# Altium PCB PCB1.PcbDoc (part 2 of 2)
Units mil, origin at the board's own origin, x right, y up, seen from the top; angles counter-clockwise.
Board outline 5700 x 5590 mil, 2 copper layers (Top Layer, Bottom Layer); 82 components, 63 nets, 275 pads, 102 vias.
Unrouted connection lines stored in the file: 1.
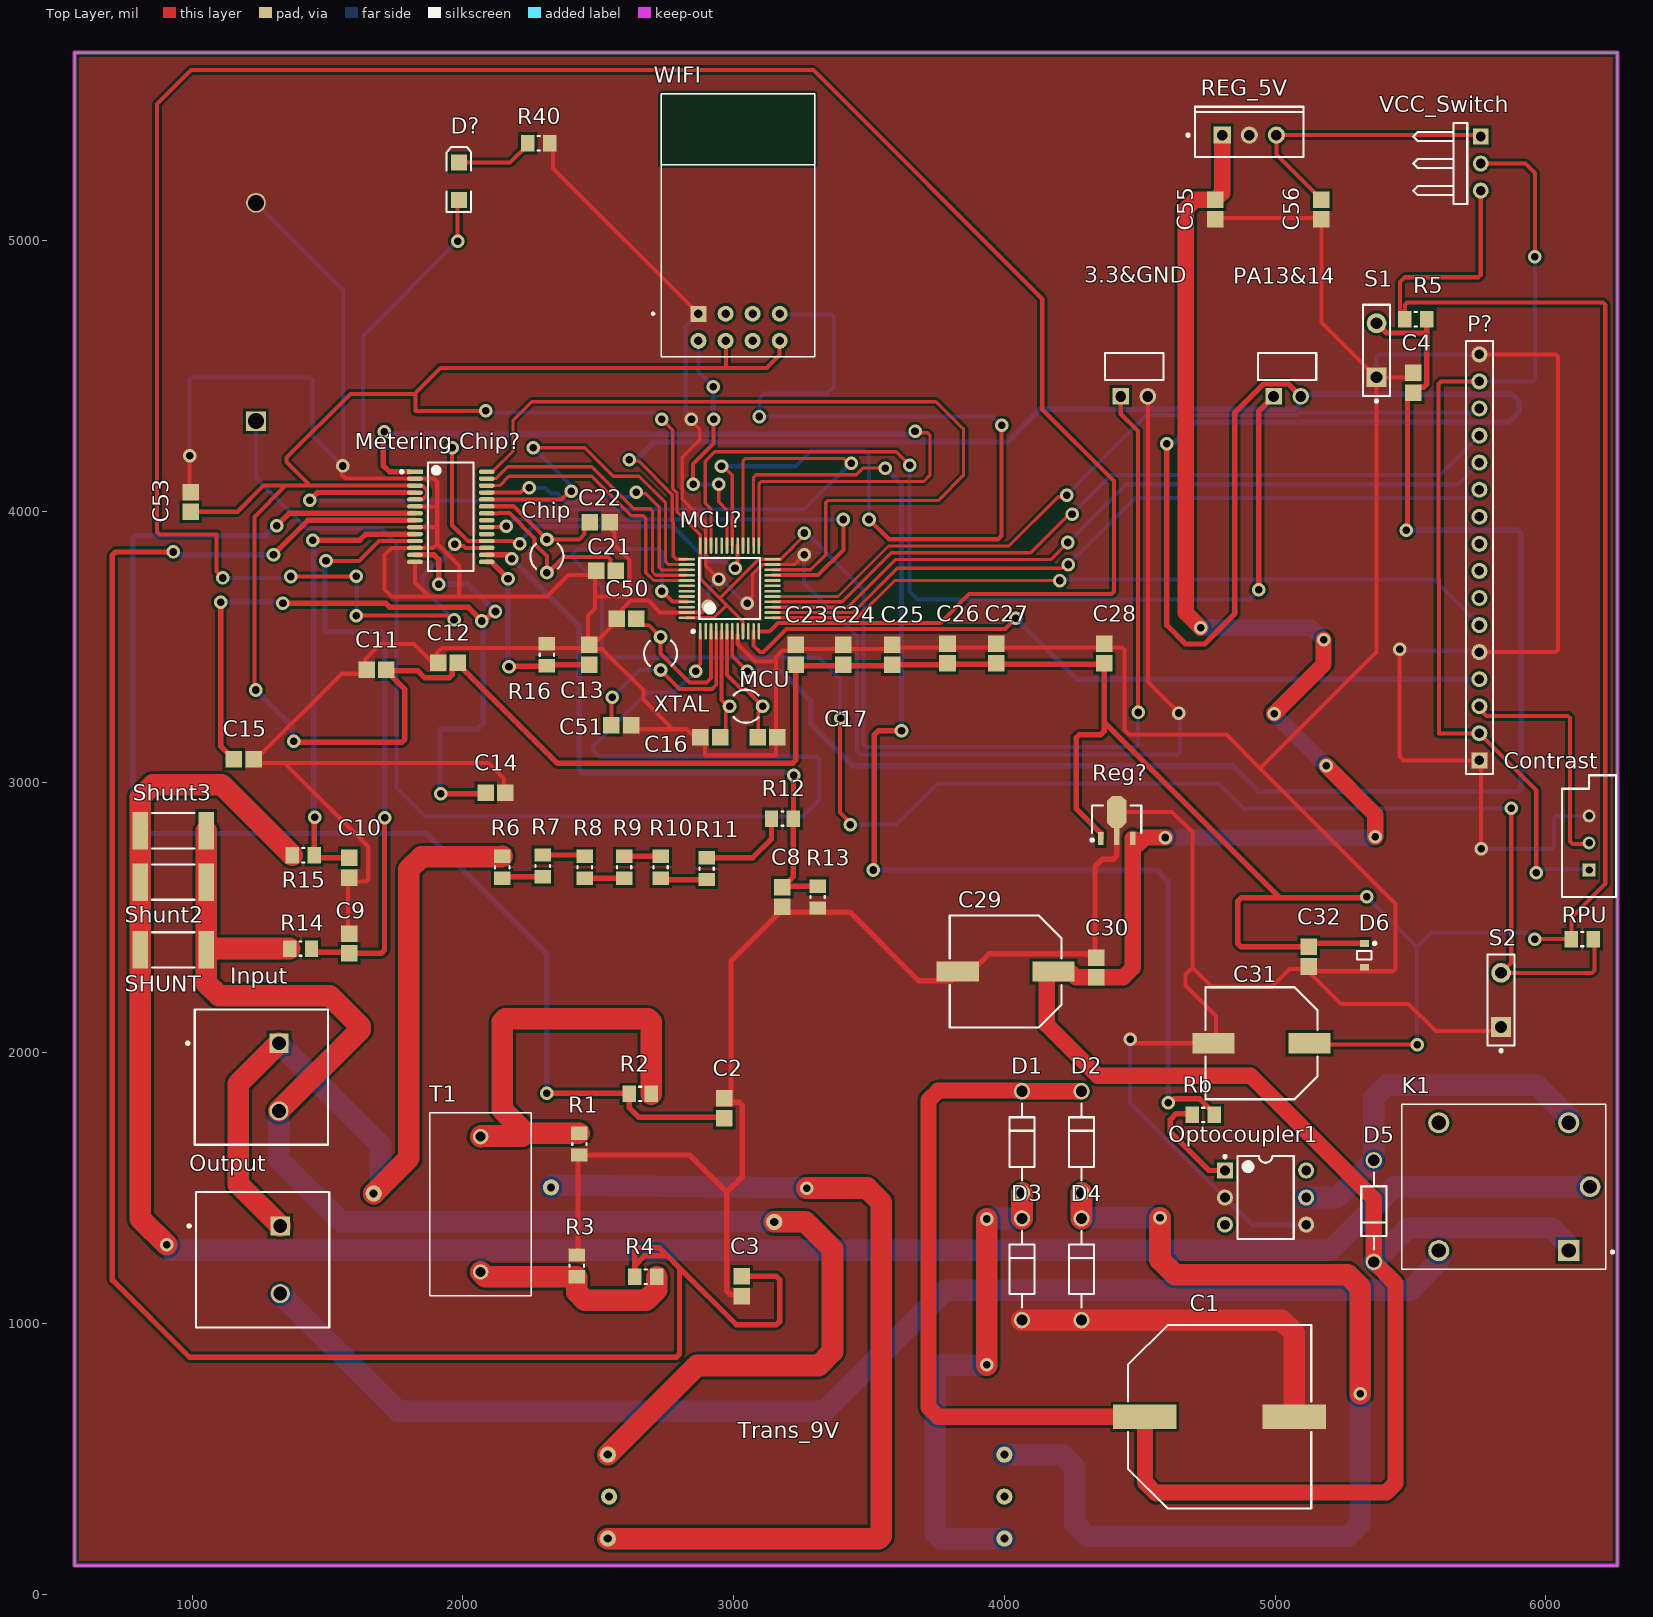
[diagram p0: Top Layer view]

## Via types
v1: diameter 50, hole 28, Top Layer to Bottom Layer, 102 vias

## Nets (pads, with @x,y where several pads share a name; then routed paths per layer and width w, separated by ;. In a path a pad name is that pad's centre, name@x,y a point inside that pad or via, vN(x,y) a via of type N, cw(c..) or ccw(c..) an arc to the next point about the centre after c; other vN are vias at no path point) (continued)
VIN: (continued)
  Bottom Layer w60: v1(4595,2795) 5368.15,2795 v1(5370.56,2797.4) ; v1(4725,3570) 5134.83,3570 v1(5179.42,3525.41) ; v1(4996.72,3252.76) 4996.98,3252.76 5189.74,3060 v1(5190,3060)
  Bottom Layer w80: D5.1 5491.68,1353.88 6020.06,1353.88 6085.16,1288.78 K1.A1
VN: "Metering Chip?.15" C13.1 R16.2 | length 733.6
  Top Layer w20: 2087.44,3813.66 2104.84,3813.66 2166.34,3752.16 v1(2166.34,3751.34) ; v1(2169.97,3425.49) 2172.22,3427.75 2307.75,3427.75 2313.94,3433.94 C13.1
  Bottom Layer w20: v1(2166.34,3751.34) 2165,3750 2165,3430.47 v1(2169.97,3425.49)
VP: "Metering Chip?.16" C8.1 R12.2 R13.2 | length 2343.6
  Top Layer w20: 2087.44,3839.25 2165.75,3839.25 v1(2180,3825) ; v1(3221.98,3024.57) 3221.17,3023.75 3221.17,2865.81 R12.2 3220.35,2651.77 C8.1 3183.94,2615.35 R13.2
  Bottom Layer w20: v1(2180,3825) 2430,3575 2430,3046.72 2441.72,3035 3210,3035 3220.43,3024.57 v1(3221.98,3024.57)
Warnout: "Metering Chip?.17" MCU?.12 | length 9734.8
  Top Layer w15: v1(1113.09,3753.94) 1090,3777.04 1090,3915 878.79,3915 870,3923.79 870,5505 995,5630 3295,5630 4140,4785 4140,4376.89 4405,4111.89 4405,3703.79 4396.21,3695 3870,3695 3763.23,3588.23 3464.54,3588.23 3464.44,3588.13 3163.13,3588.13 3131.54,3556.54 MCU?.12 ; v1(1362.93,3759.31) 1363.27,3759.66 1609.66,3759.66 v1@1610,3760 ; v1(1605,3615) 1942.45,3615 1957.46,3599.99 v1(1966.93,3599.99) ; v1(1970,3878.6) 1976.7,3871.9 2001.45,3871.9 2008.5,3864.84 2087.44,3864.84
  Bottom Layer w15: v1(1113.09,3753.94) 1333.94,3753.94 1340,3760 1362.24,3760 v1(1362.93,3759.31) ; v1(1605,3615) 1607.5,3617.5 1607.5,3757.5 v1@1610,3760 ; v1(1966.93,3599.99) 1850,3716.92 1850,3760 1901.65,3811.65 1916.65,3811.65 1939.98,3834.98 1939.98,3841.44 1970,3871.47 v1(1970,3878.6)
  other v1: 1605,3760
pads on no net: "Metering Chip?.19" "Metering Chip?.21" K1.NO MCU?.2 MCU?.10 MCU?.18 MCU?.19 MCU?.20 MCU?.27 MCU?.32 MCU?.33 MCU?.42 MCU?.43 MCU?.44 Optocoupler1.3 Optocoupler1.6 P?.7 P?.8 P?.9 P?.10 WIFI.2 WIFI.3 WIFI.7

## Polygon pours and split planes (outlines as drawn)
AGND on Top Layer "AGND_L01_P005" (solid, remove dead copper, pour order 5): 565,105 6265,105 6265,5695 565,5695
AGND on Bottom Layer "AGND_L02_P006" (solid, remove dead copper, pour order 6): 565,105 6265,105 6265,5695 565,5695

## Keep-outs
Keep-Out Layer:
  the board outline again, w15